# Altium PCB UAC.PcbDoc
Units mm, origin at the board's own origin, x right, y up, seen from the top; angles counter-clockwise.
Board outline 33.7 x 40.5 mm, 4 copper layers (Top Layer, Inner Layer1, Inner Layer2, Bottom Layer), stack 1.369 mm thick; 62 components, 35 nets, 241 pads, 79 vias.
Unrouted connection lines stored in the file: 9.
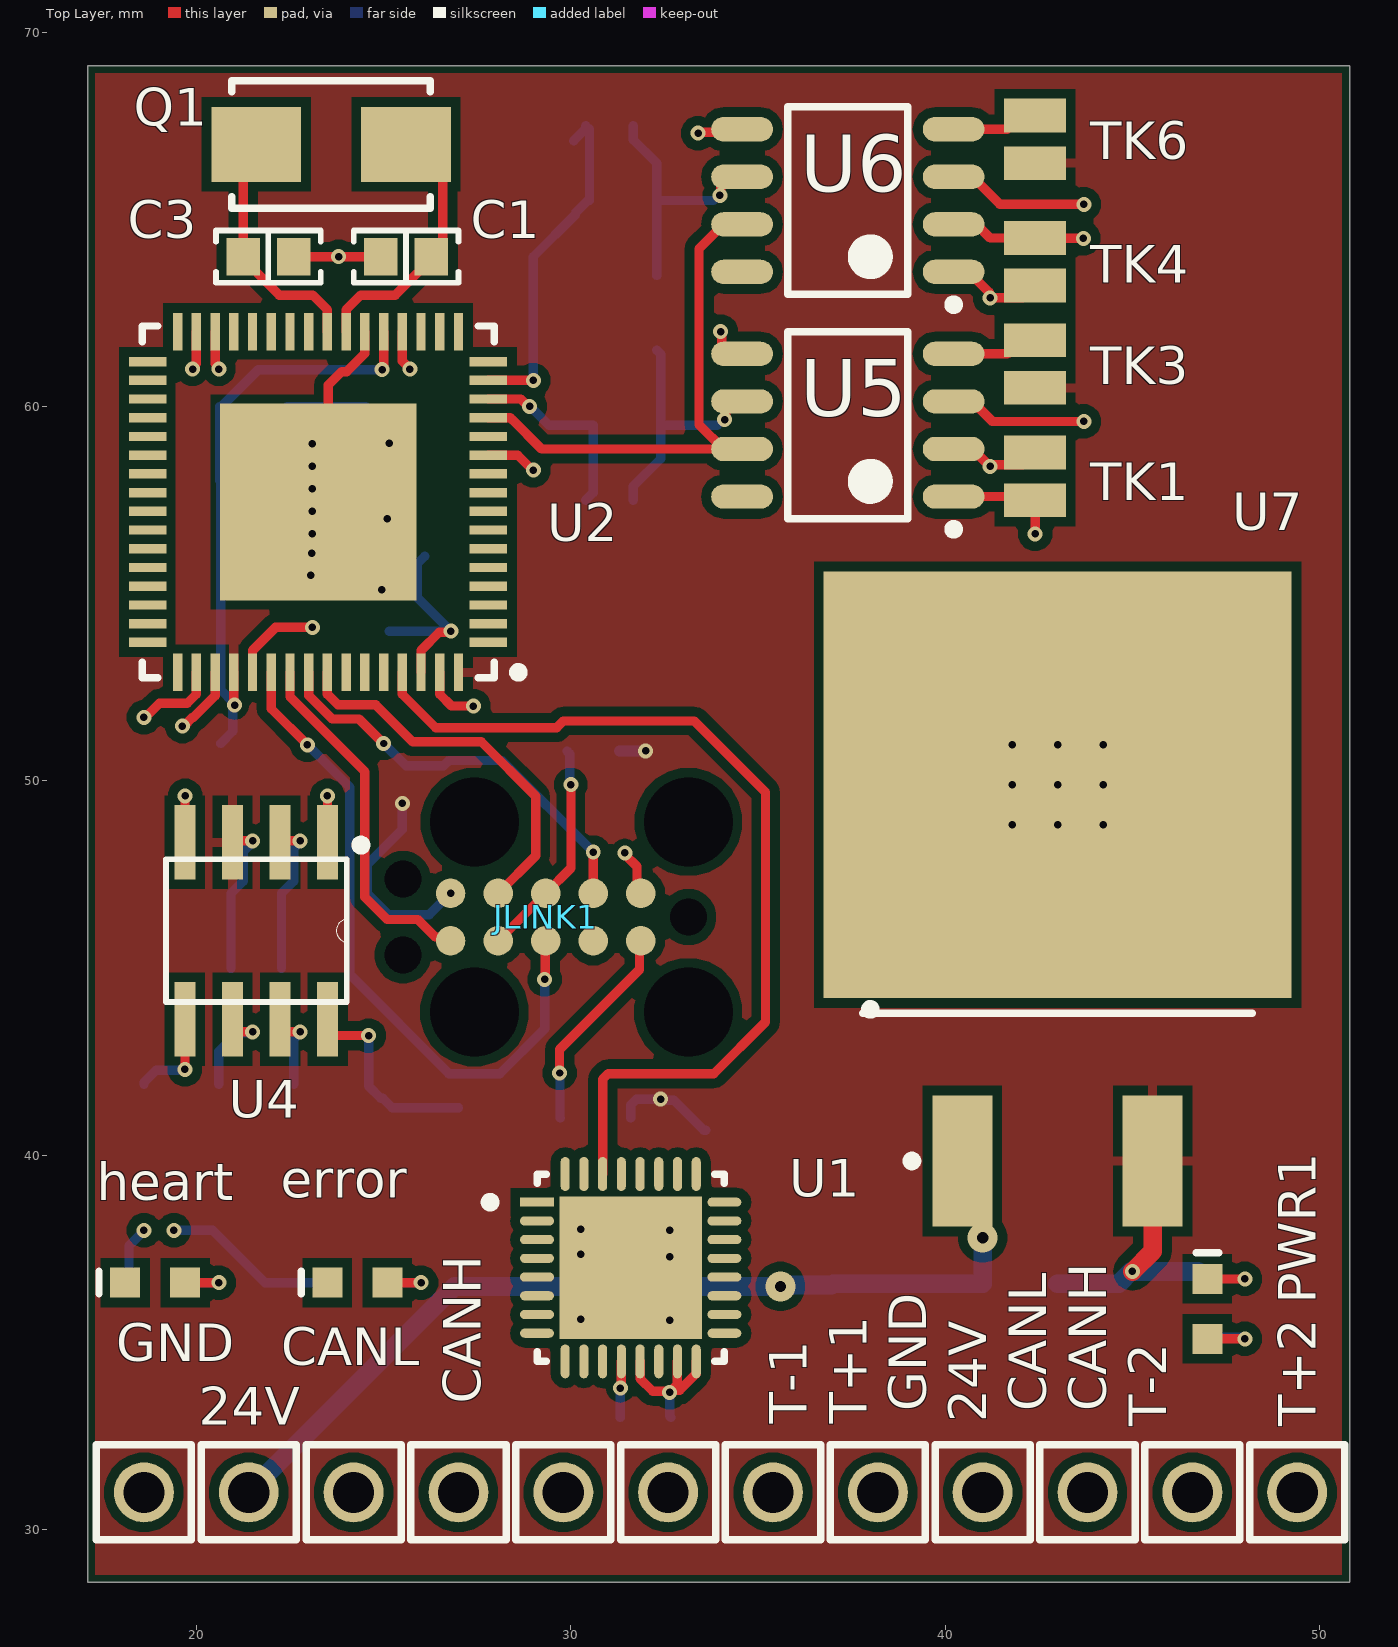
[diagram p0: Top Layer view]
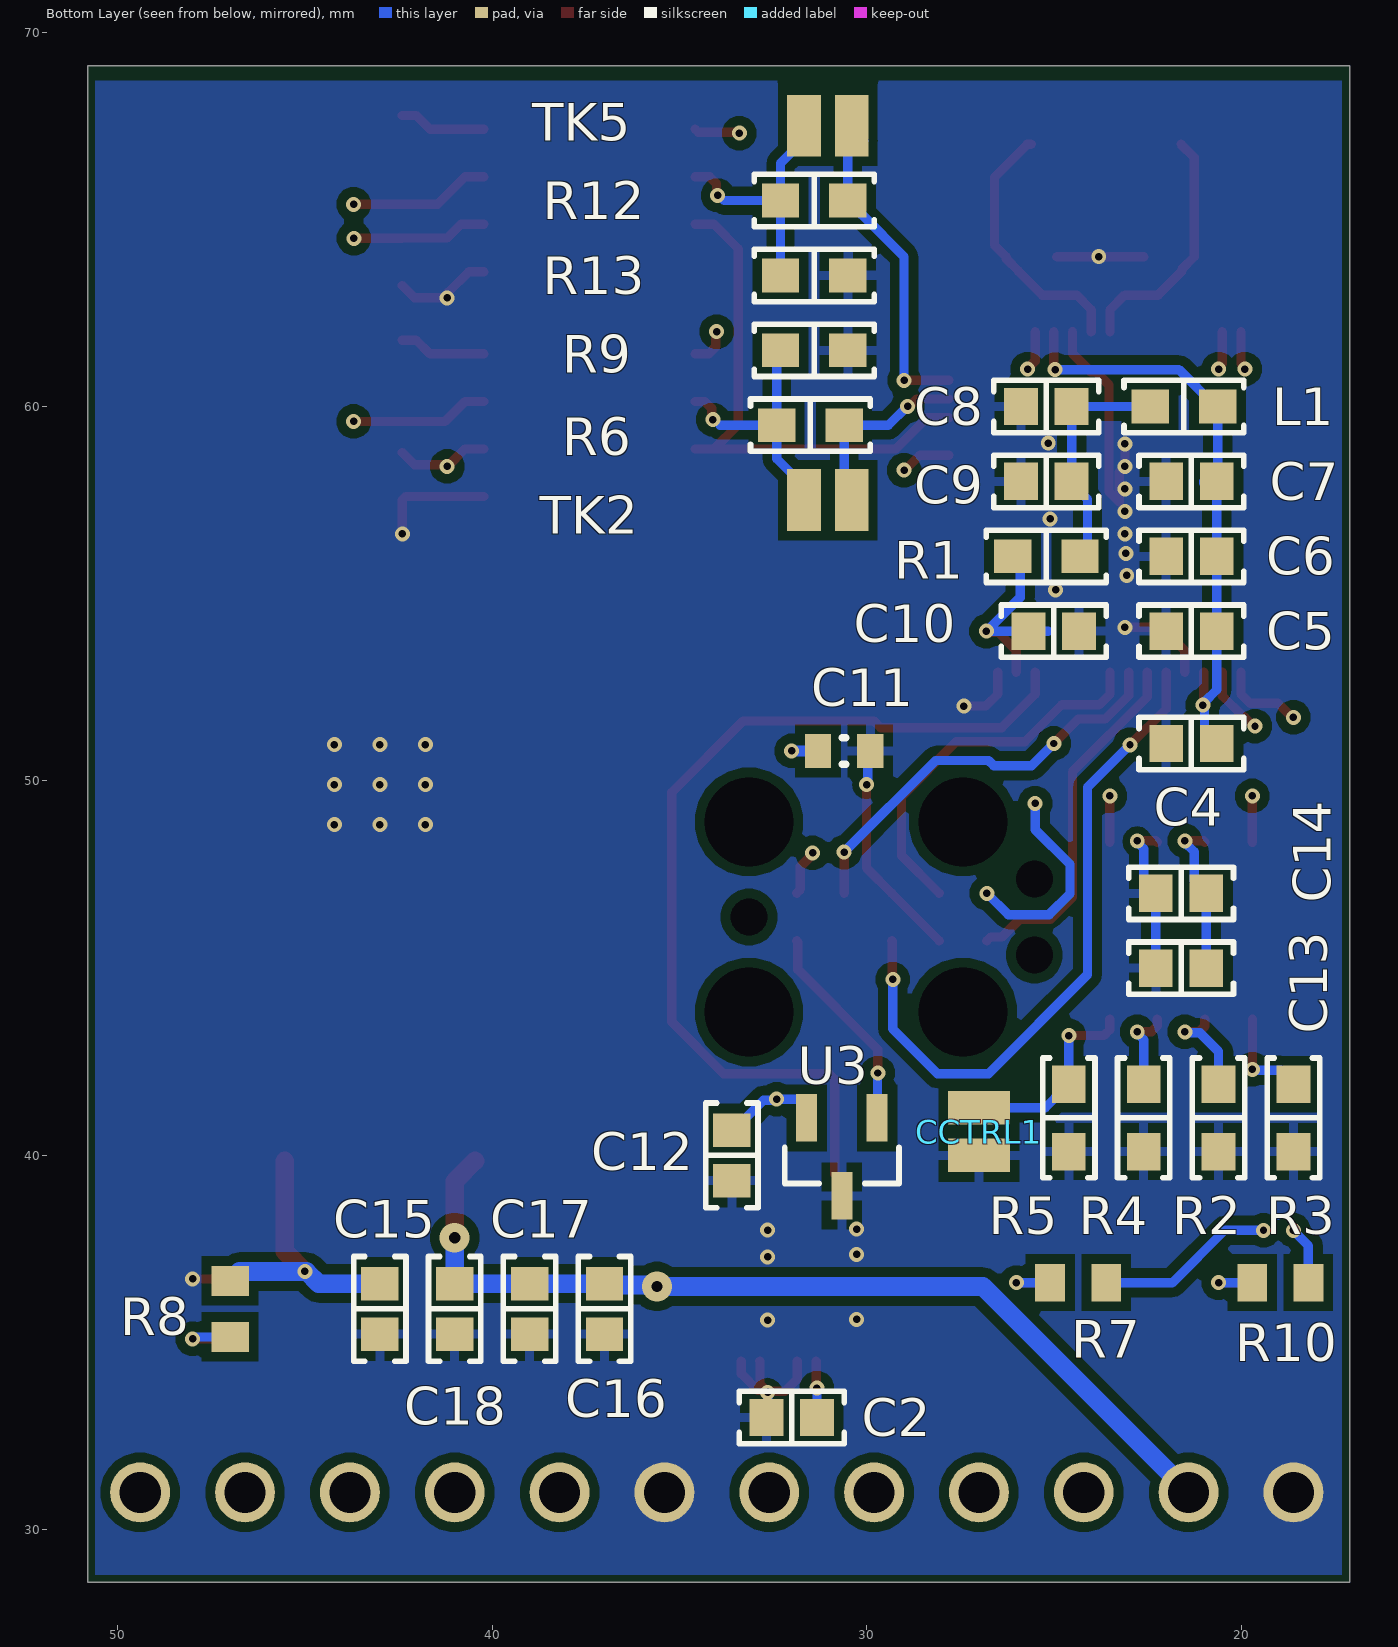
[diagram p1: Bottom Layer view, seen from below]
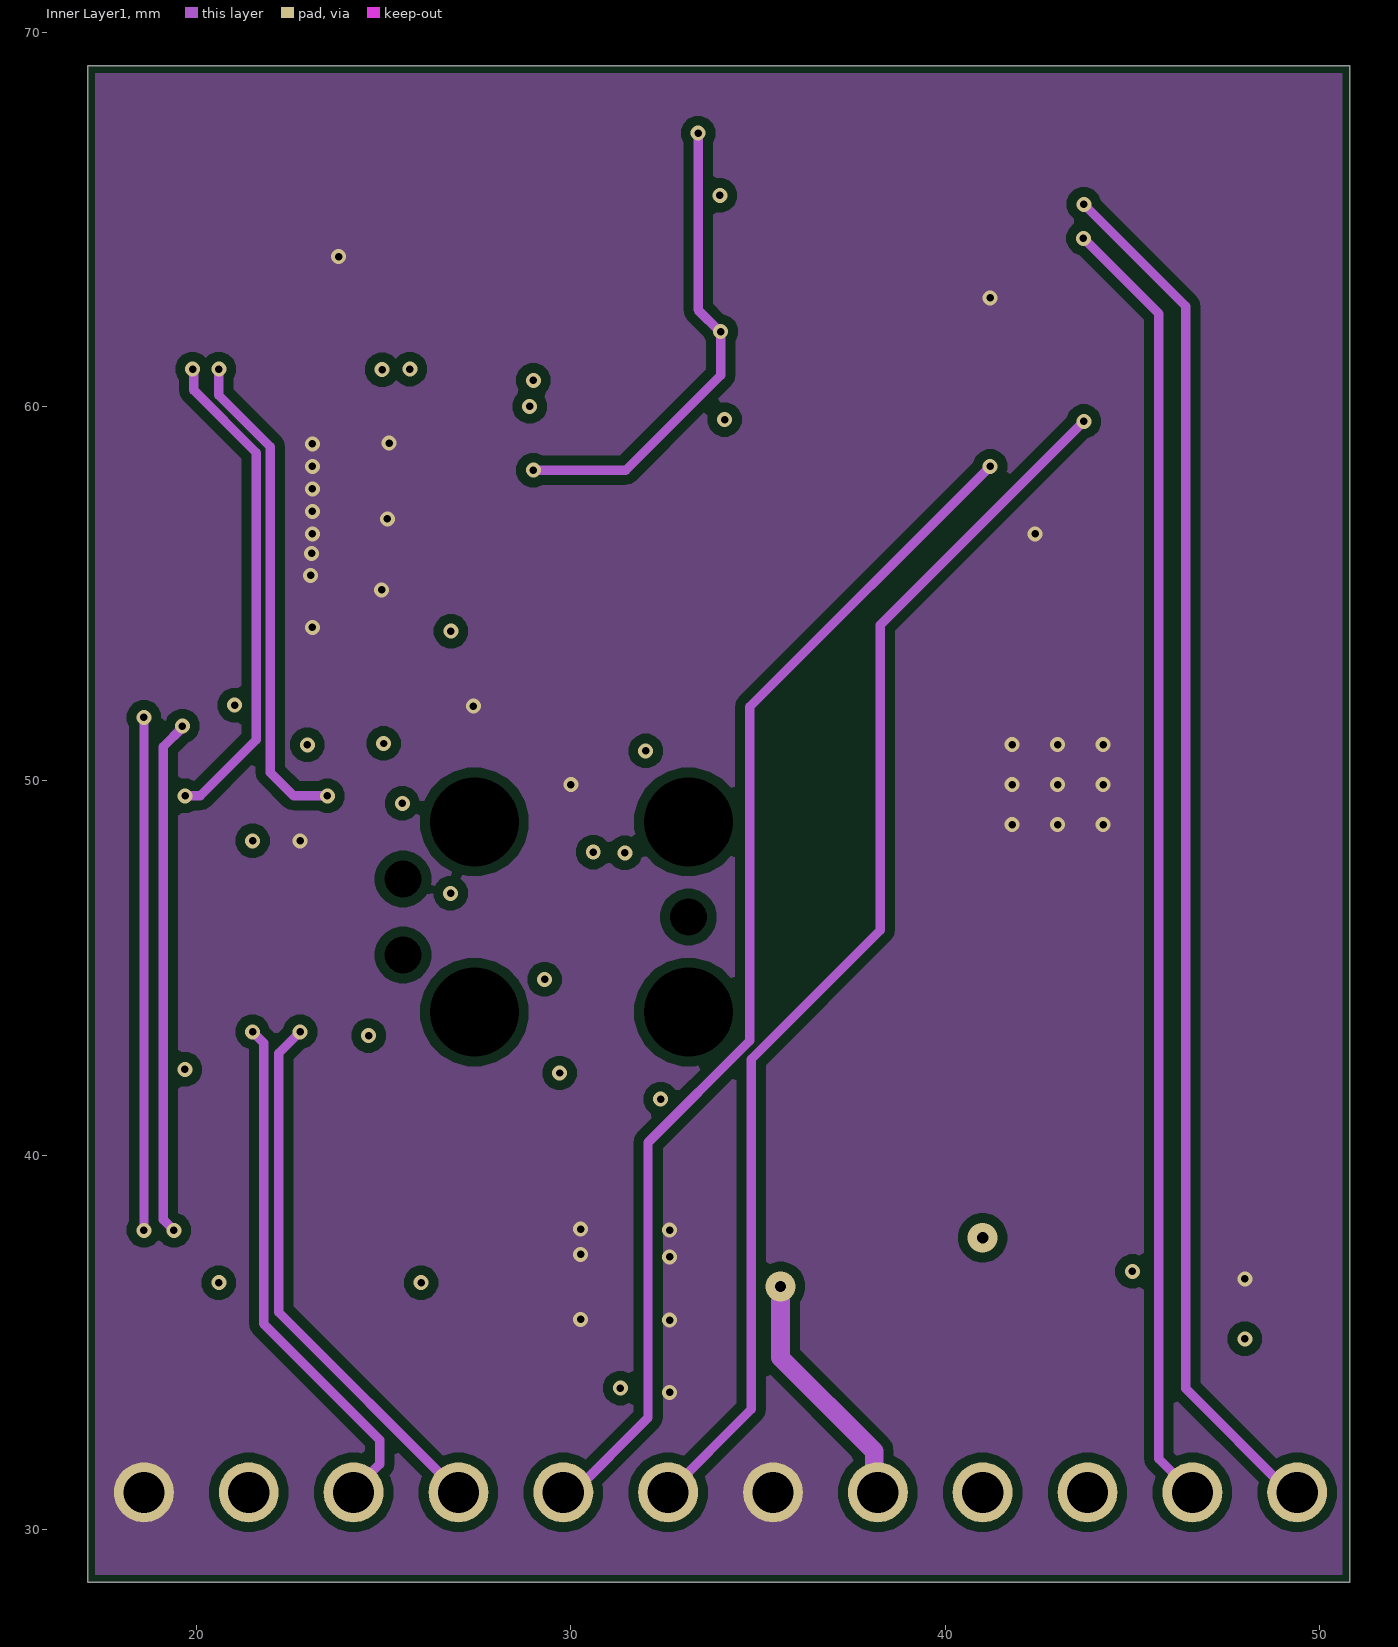
[diagram p2: Inner Layer1]
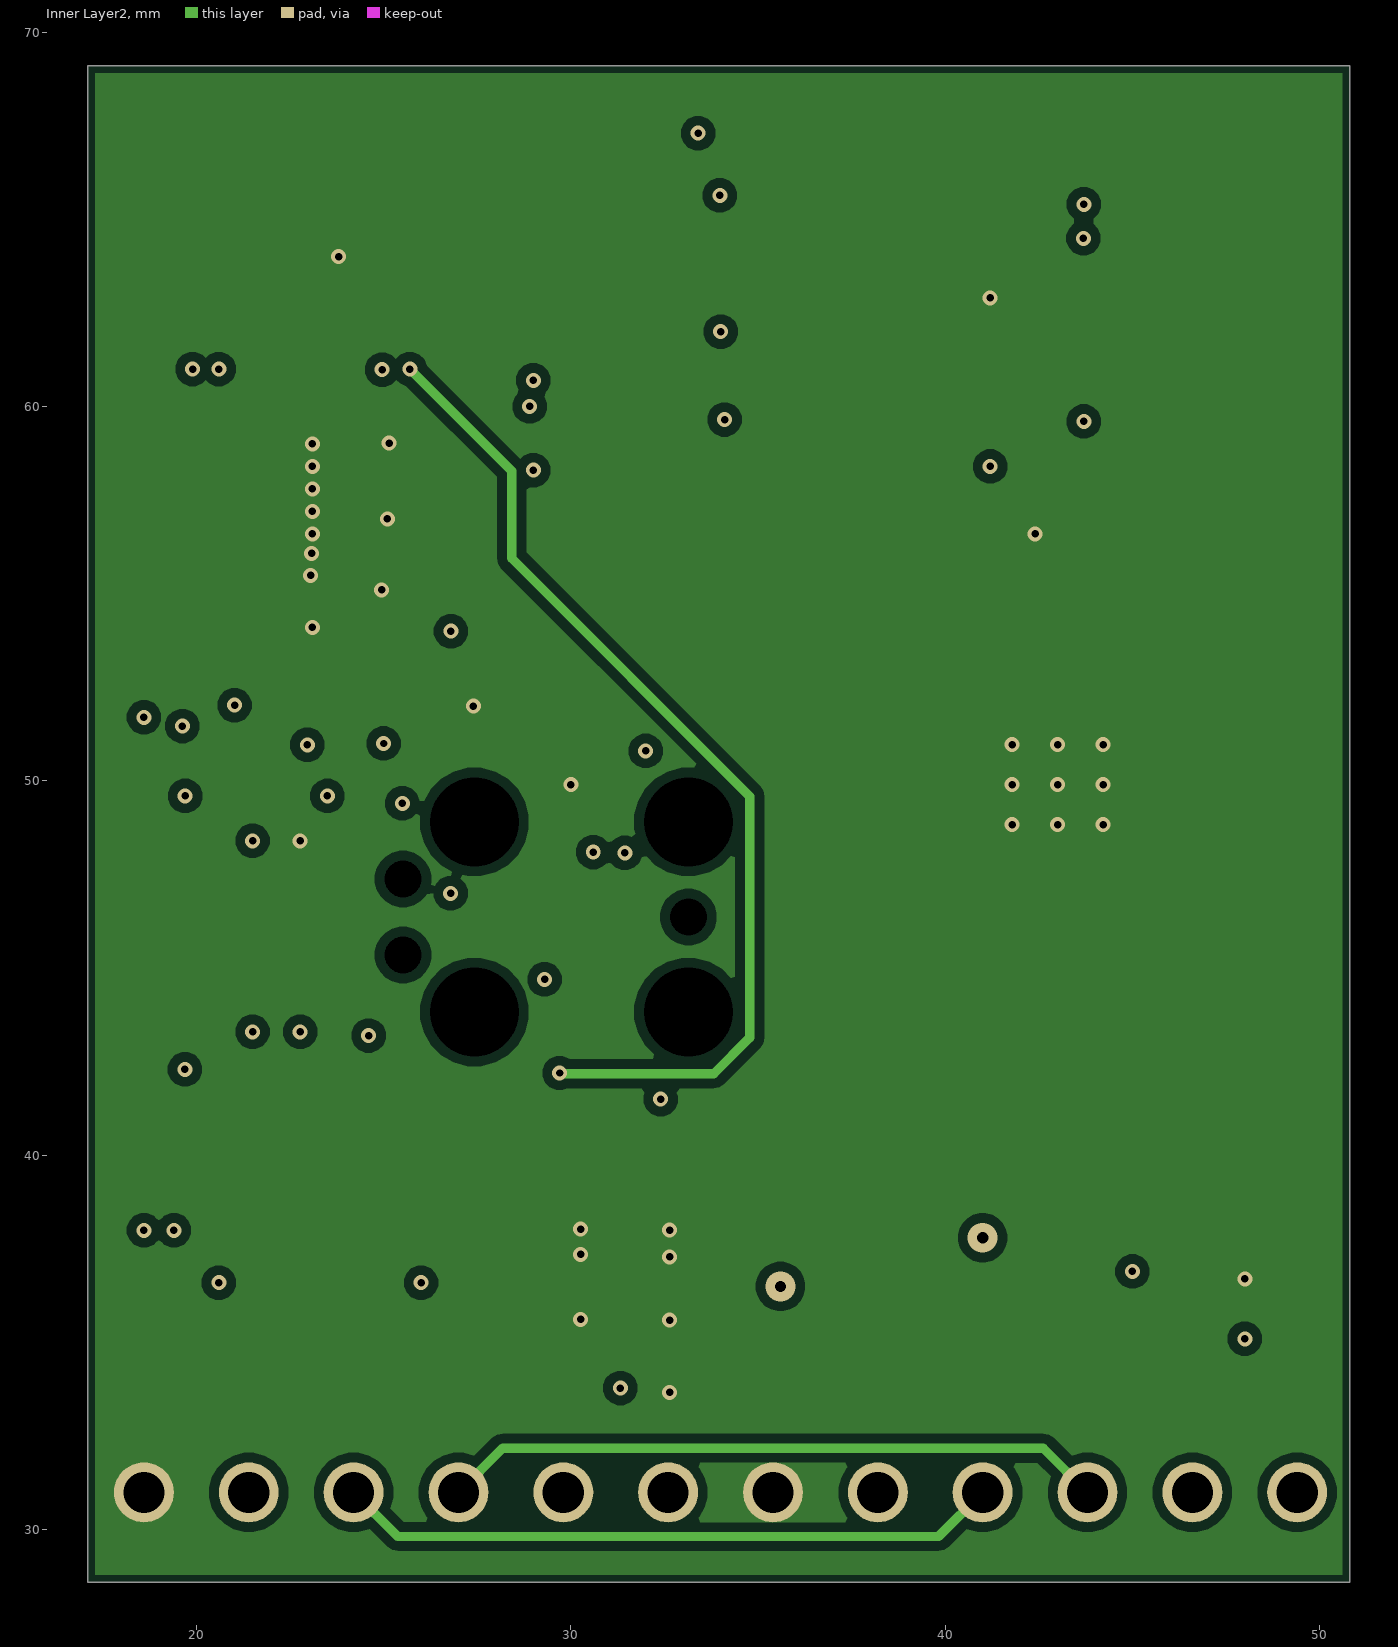
[diagram p3: Inner Layer2]
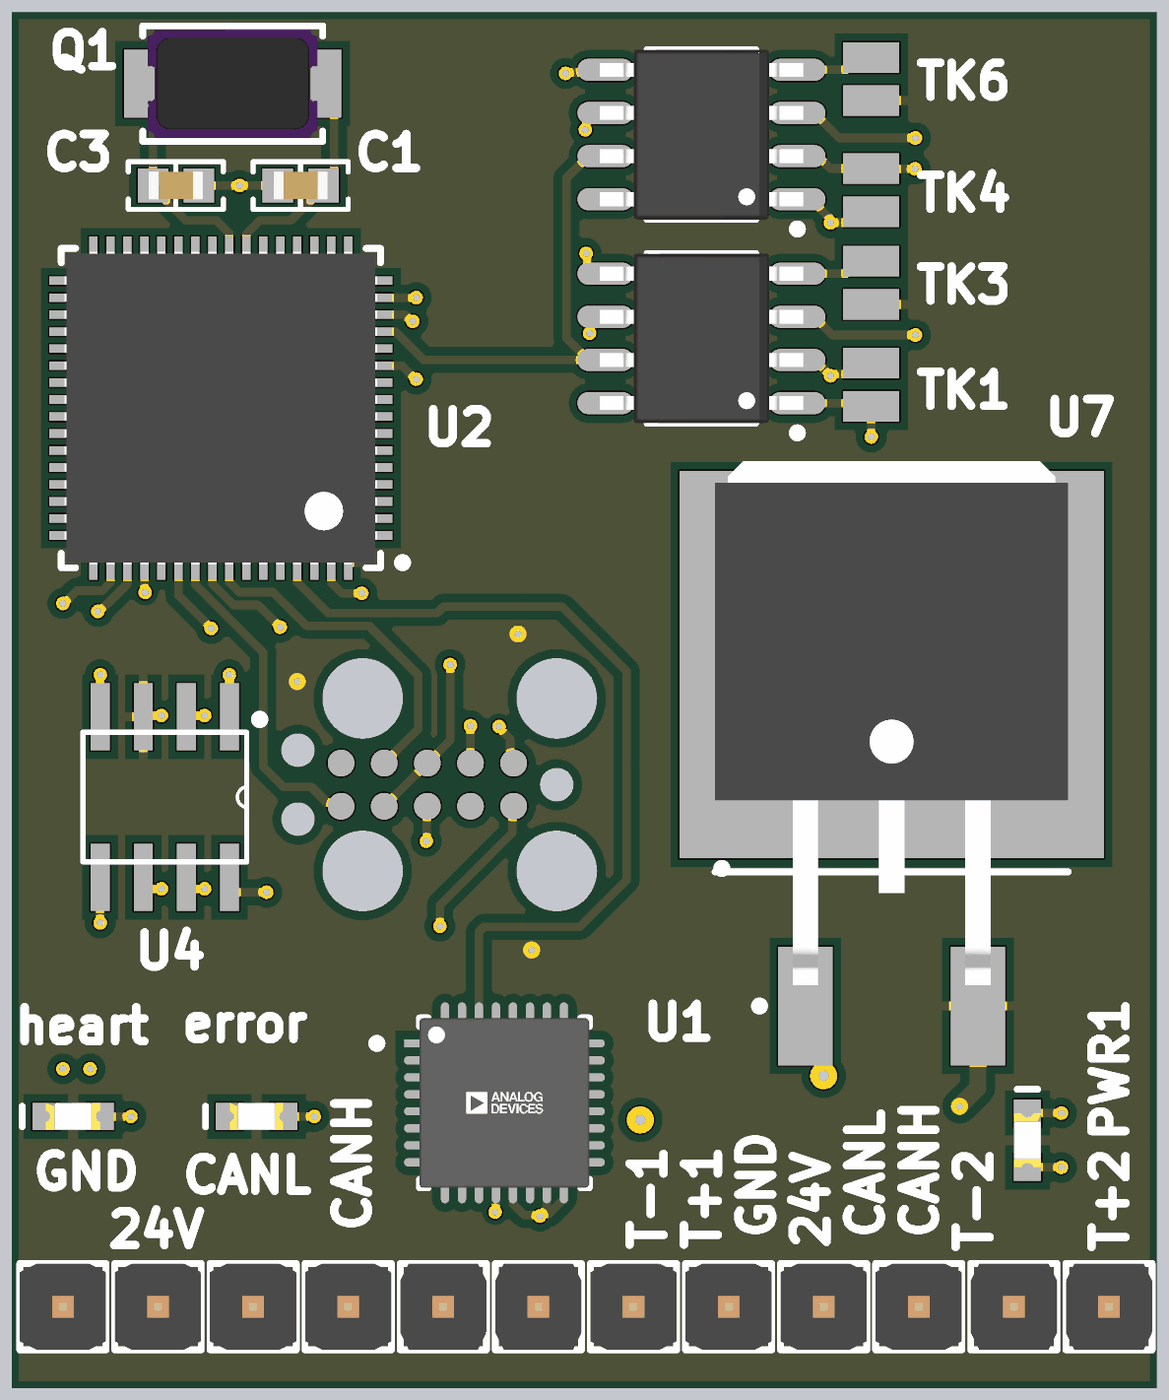
[diagram p4: 3D render of the assembled board from above, using the file's embedded part models]
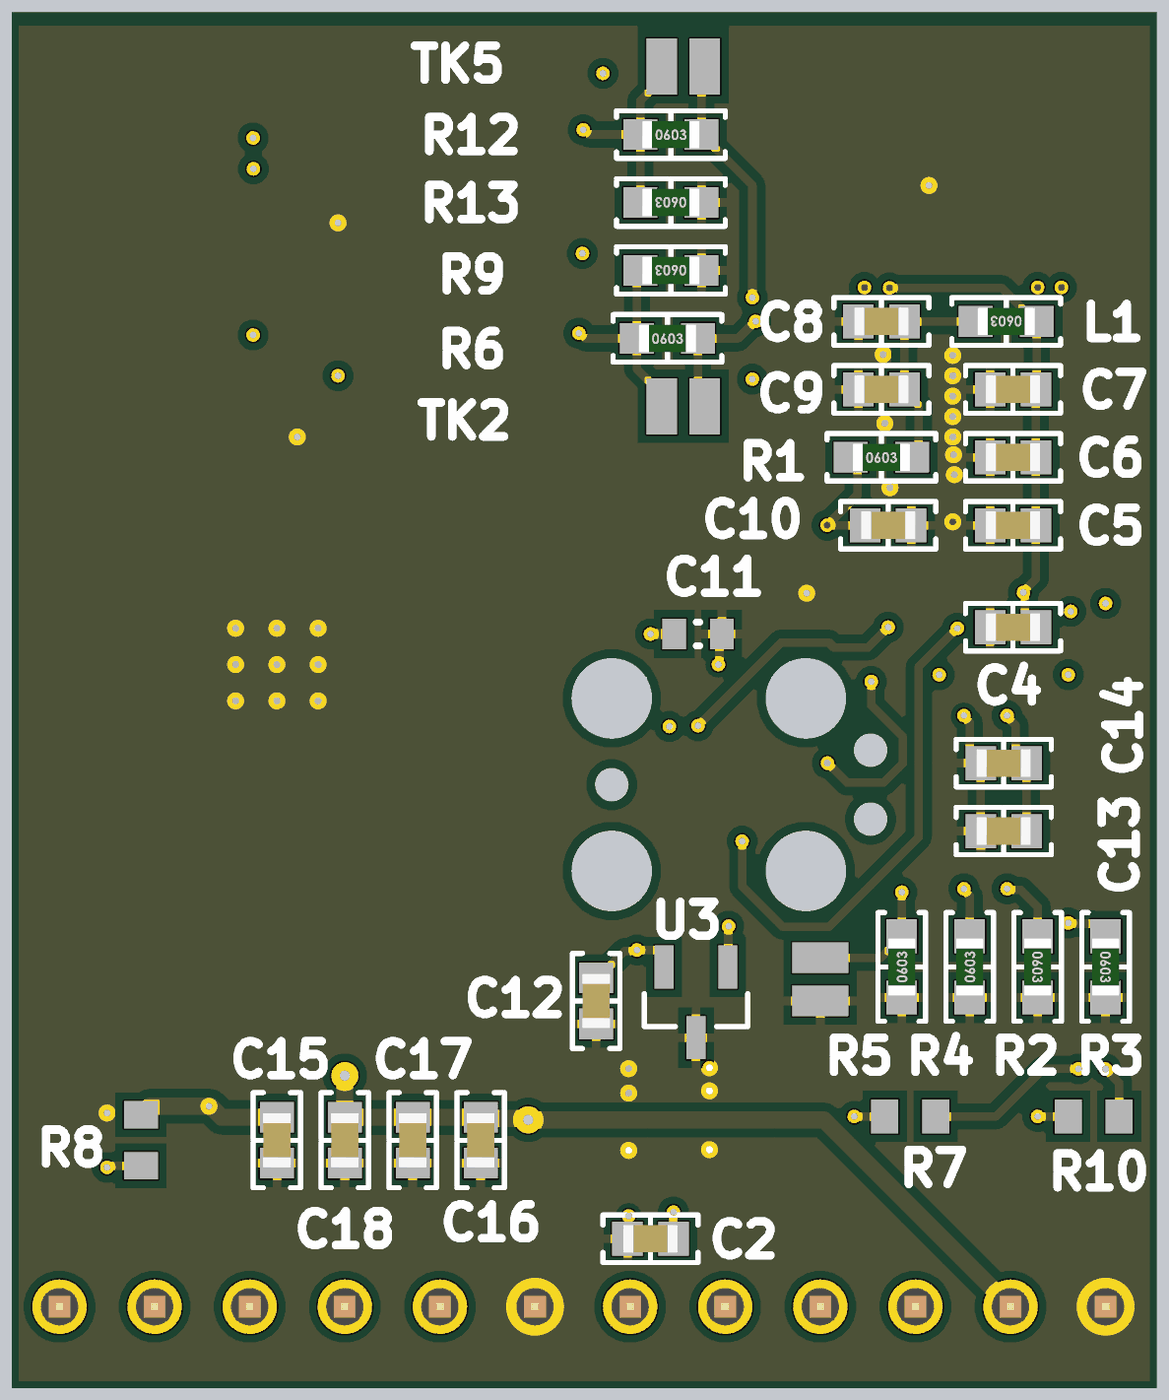
[diagram p5: 3D render of the assembled board from below, using the file's embedded part models]

## Layer stack, top to bottom
Top Solder: solder mask 0.0254, SM-001, Dk 4
Top Layer: signal copper 0.035
Dielectric 1: prepreg 0.1295, PP-017, Dk 4.3
Dielectric 2: prepreg 0.1295, PP-017, Dk 4.3
Inner Layer1: signal copper 0.035
Dielectric 3: core 0.7112, Core-039, Dk 4.8
Inner Layer2: signal copper 0.035
Dielectric 4: prepreg 0.1295, PP-017, Dk 4.3
Dielectric 5: prepreg 0.1295, PP-017, Dk 4.3
Bottom Layer: signal copper 0.035
Bottom Solder: solder mask 0.0254, SM-001, Dk 4

## Board outline
17.1,69.1 50.8,69.1 50.8,28.6 17.1,28.6 17.1,28.9

## Design rules (kind name [scope] priority, off if disabled: settings)
BoardOutlineClearance [All] p1: gap=0.2 ignorepadtopadclearanceinfootprint=FALSE // Trace to V-cut >0.4mm
Clearance Clearance_1 [All] p1: gap=0.254 ignorepadtopadclearanceinfootprint=FALSE except(0: Arc-Hole Track-Hole SMDPad-Hole THPad-Hole Via-Hole Fill-Hole Poly-Hole Region-Hole Text-Hole)
Clearance [All] p2: gap=0.254 ignorepadtopadclearanceinfootprint=TRUE except(0: Arc-Hole Track-Hole SMDPad-Hole THPad-Hole Via-Hole Fill-Hole Poly-Hole Region-Hole Text-Hole; 0.127: Arc-Arc Arc-Track Arc-Fill Arc-Poly Arc-Region Track-Track Track-Fill Track-Poly Track-Region SMDPad-SMDPad; 0.15: Arc-Text Track-Text SMDPad-Text THPad-Text Via-Text Fill-Text Poly-Text Region-Text Text-Text; 0.2: Arc-SMDPad Track-SMDPad SMDPad-Fill SMDPad-Poly SMDPad-Region; 0.33: Arc-THPad Track-THPad THPad-Fill THPad-Poly THPad-Region; 0.5: SMDPad-THPad THPad-THPad THPad-Via)
DiffPairsRouting [All] p1: maxlimit=10 minlimit=0.254 mostfreqgap=0.254 toplayer_minwidth=0.127 toplayer_maxwidth=5 toplayer_prefwidth=0.254 midlayer1_minwidth=0.127 midlayer1_maxwidth=5 midlayer1_prefwidth=0.254 midlayer2_minwidth=0.127 midlayer2_maxwidth=5 midlayer2_prefwidth=0.254 bottomlayer_minwidth=0.127 bottomlayer_maxwidth=5 bottomlayer_prefwidth=0.254 maxuncoupledlength=12.7
HoleSize [All] p1: absolutevalues=TRUE maxlimit=6.3 minlimit=0.2 maxpercent=80.000 minpercent=20.000 // Finished hole size tolerance +0.13/-0.08mm
HoleToHoleClearance [All] p1: gap=0.5 allowstackedmicrovias=TRUE
MinimumAnnularRing [All] p1: minimumring=0.13 // 1oz Copper
PolygonConnect [All] p1: connectstyle=Relief reliefconductorwidth=0.254 reliefentries=4 polygonreliefangle="90 Angle" airgapwidth=0.254
RoutingVias [All] p1: holewidth=0.711 width=1.27 viastyle="Through Hole" minholewidth=0.2 minwidth=0.4 maxholewidth=0.711 maxwidth=1.27
SolderMaskExpansion [All] p1: expansion=0.05 istentingtop=FALSE
Width [All] p1: maxlimit=20 minlimit=0.09 preferedwidth=0.25 minimp=50.000000 maximp=50.000000 favimp=50.000000
27 further rules are at their usual default settings.

## Components (designator, comment, footprint, x,y, rotation, side; value= is the part's Value field where it differs from the comment)
24V "61300111121" 61300111121 21.4,31 r90 top (schematic designator 2)
24V "61300111121" 61300111121 38.2,31 r90 top (schematic designator 1)
C1 "SMD Capacitor" "CAP 0603/1608" 25.6,64 r0 top value=18pF
C2 "SMD Capacitor" "CAP 0603/1608" 32,33 r0 bottom value=1uF
C3 "SMD Capacitor" "CAP 0603/1608" 21.925,64 r180 top value=18pF
C4 "SMD Capacitor" "CAP 0603/1608" 21.325,51 r180 bottom value=1uF
C5 "SMD Capacitor" "CAP 0603/1608" 21.325,54 r180 bottom value=100nF
C6 "SMD Capacitor" "CAP 0603/1608" 21.325,56 r180 bottom value=1uF
C7 "SMD Capacitor" "CAP 0603/1608" 21.325,58 r180 bottom value=100nF
C8 "SMD Capacitor" "CAP 0603/1608" 25.2,60 r0 bottom value=1uF
C9 "SMD Capacitor" "CAP 0603/1608" 25.2,58 r0 bottom value=100nF
C10 "SMD Capacitor" "CAP 0603/1608" 25,54 r180 bottom value=1uF
C11 "100nF 10V" CAPC0603(1608)100_L 30.6,50.8 r180 bottom value=100nF
C12 "SMD Capacitor" "CAP 0603/1608" 33.6,40 r270 bottom value=1uF
C13 "SMD Capacitor" "CAP 0603/1608" 21.6,45 r180 bottom value=100nF
C14 "SMD Capacitor" "CAP 0603/1608" 21.6,47 r180 bottom value=100nF
C15 "SMD Capacitor" "CAP 0603/1608" 43,35.9 r270 bottom value=100nF
C16 "SMD Capacitor" "CAP 0603/1608" 37,35.9 r270 bottom value=100nF
C17 "SMD Capacitor" "CAP 0603/1608" 39,35.9 r270 bottom value=220nF
C18 "SMD Capacitor" "CAP 0603/1608" 41,35.9 r270 bottom value=10nF
CANH "61300111121" 61300111121 27,31 r90 top (schematic designator CANH2)
CANH "61300111121" 61300111121 43.8,31 r90 top (schematic designator CANH1)
CANL "61300111121" 61300111121 24.2,31 r90 top (schematic designator CANL2)
CANL "61300111121" 61300111121 41,31 r90 top (schematic designator CANL1)
CCTRL1 "SMD Jumper open" SMD-JUMPER-OPEN 27,40.635 r90 bottom
error "0603 Red" 0603_A 24.3,36.6 r0 top (schematic designator Fehler1)
GND "61300111121" 61300111121 18.6,31 r90 top (schematic designator GND2)
GND "61300111121" 61300111121 35.4,31 r90 top (schematic designator GND1)
heart "0603 Blue" 0603_A 18.9,36.6 r0 top (schematic designator Heart1)
JLINK1 "JTAG" SEGGER_10_PIN 33.14,46.365 r180 top
L1 "SMD Resistor" "STACKPOLE CSR0603" 21.525,60 r0 bottom value=100n
PWR1 "0603 Green" 0603_A 47,35.9 r270 top
Q1 "16M" "NDK NX5032GA" 23.6,67 r0 top
R1 "SMD Resistor" "STACKPOLE CSR0603" 25.2,56 r180 bottom value=100
R2 "SMD Resistor" "STACKPOLE CSR0603" 20.6,41 r270 bottom value=60
R3 "SMD Resistor, optional" "STACKPOLE CSR0603" 18.6,41 r270 bottom value=300
R4 "SMD Resistor" "STACKPOLE CSR0603" 22.6,41 r90 bottom value=60
R5 "SMD Resistor" "STACKPOLE CSR0603" 24.6,41 r90 bottom value="Slope CTRL def. free"
R6 "SMD Resistor" "STACKPOLE CSR0603" 31.5,59.5 r180 bottom value="10K 0603"
R7 "0603 100" RESC1608X55X25ML10T15 24.35,36.6 r0 bottom
R8 "0603 100" RESC1608X55X25ML10T15 47,35.9 r270 bottom
R9 "SMD Resistor" "STACKPOLE CSR0603" 31.4,61.5 r0 bottom value="18K 0603"
R10 "0603 100" RESC1608X55X25ML10T15 18.95,36.6 r0 bottom
R12 "SMD Resistor" "STACKPOLE CSR0603" 31.4,65.5 r180 bottom value="10K 0603"
R13 "SMD Resistor" "STACKPOLE CSR0603" 31.4,63.5 r0 bottom value="18K 0603"
T+1 "61300111121" 61300111121 32.6,31 r0 top
T+2 "61300111121" 61300111121 49.4,31 r0 top
T-1 "61300111121" 61300111121 29.8,31 r0 top
T-2 "61300111121" 61300111121 46.6,31 r0 top
TK1 "SMD Jumper open" SMD-JUMPER-OPEN 42.4,58.135 r90 top
TK2 "SMD Jumper open" SMD-JUMPER-OPEN 31.035,57.5 r180 bottom
TK3 "SMD Jumper open" SMD-JUMPER-OPEN 42.4,61.135 r90 top
TK4 "SMD Jumper open" SMD-JUMPER-OPEN 42.4,63.865 r90 top
TK5 "SMD Jumper open" SMD-JUMPER-OPEN 31.035,67.5 r180 bottom
TK6 "SMD Jumper open" SMD-JUMPER-OPEN 42.4,67.135 r90 top
U1 "ADXL1002BCPZ" Analog_Devices_CP-32-26_IPC_A 31.6,37 r0 top
U2 "AT90CAN128" AT90CAN128-16MU 23.25,57.45 r180 top
U3 "MCP130T-450I/TT" *SOT95P237X112-3N 30.66,39.959 r0 bottom
U4 "MCP2551/2561" *SOIC127P600X175-8N 21.6,46 r270 top
U5 "MAX6675ISA+" SOIC8 37.4,59.5 r180 top value=Value
U6 "MAX6675ISA+" SOIC8 37.4,65.5 r180 top value=Value
U7 "L7805ABD2T-TR" DPAK254P1542X460-3M 43,47.15 r90 top

## Footprints (in the part's own frame and the unit in brackets; to place one, negate y for a bottom-side part, rotate by r counter-clockwise, add the part's x,y. Pads: shape width x height; smd on the part's side, far side on the other; paste and mask are expansions set on the pad)
0603_A [mm] "Chip LED, 2-Leads, Body 1.6x0.8mm, IPC Medium Density"
  rect 0.8x0.8 smd: 1(-0.8,0) 2(0.8,0)
  silkscreen extent -1.5,-0.3 -1.5,0.3, body extent -0.8,-0.4 0.8,0.4, height 0.7
61300111121 [mm] "1pins, 1 row, straight, gold plating"
  round 1.6 hole 1.1: 1(0,0)
  silkscreen extent -1.27,-1.27 1.27,1.27, body extent -1.27,-1.27 1.27,1.27, height 8.57
*SOIC127P600X175-8N [mil]
  rect 78x22 smd: 1(-93,75) 2(-93,25) 3(-93,-25) 4(-93,-75) 5(93,-75) 6(93,-25) 7(93,25) 8(93,75)
  silkscreen extent -95,-95 75,115, body extent -75,-95 75,95, height 80
*SOT95P237X112-3N [mil]
  rect 22x50 smd: 1(-37,-41) 2(37,-41) 3(0,41)
  silkscreen extent -60,-10 60,28, body extent -60,-25 60,25, height 50
Analog_Devices_CP-32-26_IPC_A [mm]
  rect 0.906x0.242 smd paste+0 mask+0: 1(-2.503,1.75)
  rrect100% 0.906x0.242 smd paste+0 mask+0: 2(-2.503,1.25) 3(-2.503,0.75) 4(-2.503,0.25) 5(-2.503,-0.25) 6(-2.503,-0.75) 7(-2.503,-1.25) 8(-2.503,-1.75) 17(2.503,-1.75) 18(2.503,-1.25) 19(2.503,-0.75) 20(2.503,-0.25) 21(2.503,0.25) 22(2.503,0.75) 23(2.503,1.25) 24(2.503,1.75)
  rrect100% 0.242x0.906 smd paste+0 mask+0: 9(-1.75,-2.503) 10(-1.25,-2.503) 11(-0.75,-2.503) 12(-0.25,-2.503) 13(0.25,-2.503) 14(0.75,-2.503) 15(1.25,-2.503) 16(1.75,-2.503) 25(1.75,2.503) 26(1.25,2.503) 27(0.75,2.503) 28(0.25,2.503) 29(-0.25,2.503) 30(-0.75,2.503) 31(-1.25,2.503) 32(-1.75,2.503)
  rect 3.8x3.8 smd paste-1000 mask+0: 33(0,0)
  silkscreen extent -3.88,-2.5 2.5,2.5, body extent -2.5,-2.5 2.5,2.5, height 1.85
AT90CAN128-16MU [mm] "QFN, 64-Leads, Body 9,00x9,00mm, Pitch 0,50mm, Thermal Pad 5,25x5,25mm, IPC Medium Density"
  rect 1x0.25 smd mask+0.05: 1(-4.55,3.75) 2(-4.55,3.25) 3(-4.55,2.75) 4(-4.55,2.25) 5(-4.55,1.75) 6(-4.55,1.25) 7(-4.55,0.75) 8(-4.55,0.25) 9(-4.55,-0.25) 10(-4.55,-0.75) 11(-4.55,-1.25) 12(-4.55,-1.75) 13(-4.55,-2.25) 14(-4.55,-2.75) 15(-4.55,-3.25) 16(-4.55,-3.75) 33(4.55,-3.75) 34(4.55,-3.25) 35(4.55,-2.75) 36(4.55,-2.25) 37(4.55,-1.75) 38(4.55,-1.25) 39(4.55,-0.75) 40(4.55,-0.25) 41(4.55,0.25) 42(4.55,0.75) 43(4.55,1.25) 44(4.55,1.75) 45(4.55,2.25) 46(4.55,2.75) 47(4.55,3.25) 48(4.55,3.75)
  rect 0.25x1 smd mask+0.05: 17(-3.75,-4.55) 18(-3.25,-4.55) 19(-2.75,-4.55) 20(-2.25,-4.55) 21(-1.75,-4.55) 22(-1.25,-4.55) 23(-0.75,-4.55) 24(-0.25,-4.55) 25(0.25,-4.55) 26(0.75,-4.55) 27(1.25,-4.55) 28(1.75,-4.55) 29(2.25,-4.55) 30(2.75,-4.55) 31(3.25,-4.55) 32(3.75,-4.55) 49(3.75,4.55) 50(3.25,4.55) 51(2.75,4.55) 52(2.25,4.55) 53(1.75,4.55) 54(1.25,4.55) 55(0.75,4.55) 56(0.25,4.55) 57(-0.25,4.55) 58(-0.75,4.55) 59(-1.25,4.55) 60(-1.75,4.55) 61(-2.25,4.55) 62(-2.75,4.55) 63(-3.25,4.55) 64(-3.75,4.55)
  rect 5.25x5.25 smd: 63(0,0)
  silkscreen extent -5.48,-4.7 4.7,4.7, body extent -4.6,-4.6 4.6,4.6, height 1
"CAP 0603/1608" [mm] "Chip Capacitor, 2-Leads, Body 1.60x0.80mm, IPC Medium Density"
  rect 0.9x1 smd: 1(-0.675,0) 2(0.675,0)
  silkscreen extent -1.4,-0.7 1.4,0.7, body extent -0.8,-0.41 0.8,0.41, height 0.82
CAPC0603(1608)100_L [mm] "Chip Capacitor, Body 1.6x0.8mm, Height 1.0mm, IPC High Density"
  rect 0.7x0.9 smd: 1(-0.7,0) 2(0.7,0)
  silkscreen extent -0.05,-0.35 0.05,0.35, body extent -0.87,-0.47 0.88,0.48, height 1
DPAK254P1542X460-3M [mm] "D2-PAK, 3-Pads, Body 7,78x8,56mm (max), IPC Low Density"
  rect 3.5x1.6 smd: 1(-7.3,2.54) 3(-7.3,-2.54)
  rect 11.4x12.5 smd: 4(2.75,0)
  silkscreen extent -7.42,-5.2 -3.35,5.2, body extent -6.69,-5.2 8.73,5.2, height 4.63
"NDK NX5032GA" [mm] "Crystal, 2-Leads, Body 5.00x3.20mm, IPC Medium Density"
  rect 2.4x2 smd: 1(-2,0) 2(2,0)
  silkscreen extent -2.65,-1.7 2.65,1.7, body extent -2.5,-1.6 2.5,1.6, height 1.2
RESC1608X55X25ML10T15 [mm] "Chip Resistor, 2-Leads, Body 1.60x0.80mm, IPC Low Density"
  rect 0.8x1 smd: 1(-0.75,0) 2(0.75,0)
  body extent -0.85,-0.45 0.85,0.45, height 0.55
SEGGER_10_PIN [mm]
  round 0.787 smd: 1(1.27,-0.635) 2(2.54,-0.635) 3(3.81,-0.635) 4(5.08,-0.635) 5(6.35,-0.635) 6(6.35,0.635) 7(5.08,0.635) 8(3.81,0.635) 9(2.54,0.635) 10(1.27,0.635)
  round 0 hole 2.375 unplated: ""(0,2.54) ""(0,-2.54) ""(5.715,-2.54) ""(5.715,2.54)
  round 0 hole 0.991 unplated: ""(0,0) ""(7.62,-1.015) ""(7.62,1.015)
SMD-JUMPER-OPEN [mm] "Jumper, SMD"
  rect 0.9x1.65 smd: 1(-0.635,0) 2(0.635,0)
SOIC8 [mm] "SOIC, 8-Leads, Body 4,90x3,90mm, Pitch 1,27mm, IPC Low Density"
  oval 1.65x0.65 smd: 1(-2.825,1.905) 2(-2.825,0.635) 3(-2.825,-0.635) 4(-2.825,-1.905) 5(2.825,-1.905) 6(2.825,-0.635) 7(2.825,0.635) 8(2.825,1.905)
  silkscreen extent -2.95,-2.5 1.6,2.9, body extent -3,-2.5 3,2.5, height 1.75
"STACKPOLE CSR0603" [mm] "Chip Resistor, 2-Leads, Body 1.60x0.80mm, IPC Medium Density"
  rect 1x0.9 smd: 1(-0.9,0) 2(0.9,0)
  silkscreen extent -1.6,-0.7 1.6,0.7, body extent -0.85,-0.4 0.85,0.4, height 0.45

## Part data
24V 24V CANH CANH CANL CANL GND GND T+1 T+2 T-1 T-2: "WR-PHD 2.54 mm THT Pin Header, 1p", Rated Current="3 A", Withstanding Voltage="500 VAC", Working Voltage="250 VAC", ComponentLink1Description=Manufacturer, ComponentLink1URL=http://www.we-online.de, ComponentLink2Description=Datasheet, ComponentLink2URL=http://katalog.we-online.de/em/datasheet/6130xx11121.pdf, Part Number=61300111121, Pin Number=1, Pitch="2.54 mm", Published Date="Aug 2017", Publisher="Wurth Elektronik"
C1 C2 C3 C4 C5 C6 C7 C8 C9 C10 C12 C13 C14 C15 C16 C17 C18: "Capacitor with multiple Footprints"
C11: library part CMP-1035-02579-1, "CAP 100nF 10V ±5% 0603 (1608 Metric) Thickness 1mm SMD", Case-EIA=0603, Case-Metric=1608, Rated Voltage="10 V", Tolerance=Â±5%, Max Thickness="1 mm", Technology=SMT
error heart PWR1: library part CMP-1426-00002-1, "SMD mono-color Chip LED, WL-SMCW, Green", Color=Green, Manufacturer="Wuerth Elektronik", PartNumber=150060GS75000, ComponentLink1Description="Manufacturer URL", ComponentLink1URL=http://www.we-online.com, ComponentLink2Description=Datasheet, ComponentLink2URL=http://katalog.we-online.com/led/datasheet/150060GS75000.pdf, PackageReference=0603_A
JLINK1: library part "Segger 10-Pin"
L1: "Spule"
Q1: library part "16 MHz Quartz", "16 MHz Quartz"
R1 R2 R4 R5 R6 R9 R12 R13: "Resistor with multiple footprints"
R3: library part "SMD Resistor", "Resistor with multiple footprints"
R7 R8 R10: library part CMP-2100-03663-1, "Chip Resistor, 100 Ohm, +/- 1%, 0.1 W, -55 to 155 degC, 0603 (1608 Metric), RoHS, Tape and Reel", Case Code (Imperial)=0603, Case Code (Metric)=1608, Manufacturer=Yageo, Max Operating Temperature=155degC, Min Operating Temperature=-55degC, Package Description="2-Pin Surface Mount Device, Body 1.6 x 0.8 mm", Power Rating=100mW, Resistance=100Ohm, Temperature Coefficient=100ppm/degreesC, Tolerance=1%, Voltage Rating=50V, Case/Package=0603, Composition=ThickFilm, Datasheet URL=http://www.yageo.com/NewPortal/yageodocoutput?fileName=/pdf/R-Chip/PYu-RC_Group_51_RoHS_L_5.pdf, Datasheet Version="Rev. 5, 10/2016", Depth=0.8mm, Height=0.45mm, Lead Free=LeadFree, Length=1.6mm, Manufacturer URL=http://www.yageo.com/, Military Standard=Not, Number of Pins=2, Package Reference=0603, Packaging=TapeandReel, REACH SVHC=Unknown, RoHSCompliant=true, Termination=SMD/SMT, Voltage Rating (DC)=50V, Width=0.8mm
U2: "Ic Mcu 8bit 128kb Flash 64tqfp", Package="TQFP-64 Microchip", Availability=Unavailable, MF=Microchip, MP=AT90CAN128-16AI, Price=None, SnapEDA_Link=https://www.snapeda.com/parts/AT90CAN128-16AI/Microchip/view-part/?ref=snap
U3: "System Supervisors - Power Supply Monitors with Reset Generators Open Drain Low", Package="SOT-23-3 Microchip", Availability=Unavailable, MF=Microchip, MP=MCP120T-450I/TT, Price=None, SnapEDA_Link=https://www.snapeda.com/parts/MCP120T-450I/TT/Microchip/view-part/?ref=snap
U4: library part MCP2551-I/SN, "MCP2551 Series 5.5 V 1 Mb/s Surface Mount High-Speed CAN Transceiver - SOIC-8", Package="SOIC-8 Microchip", Availability=Unavailable, MF=Microchip, MP=MCP2551-I/SN, Price=None, SnapEDA_Link=https://www.snapeda.com/parts/MCP2551-I/SN/Microchip/view-part/?ref=snap
U5 U6: library part MAX31855KASA+, "Sensor-Schnittstelle Cold-Junction-Compensated K-Thermocouple-to-Digital Converter (0 C to +1024 C)", Built_By=EMA_UL_Team, ComponentLink1Description="Mouser Link", ComponentLink1URL=https://www.mouser.de/ProductDetail/Maxim-Integrated/MAX6675ISA%2b?qs=sGAEpiMZZMvC4tFtz7F%252BjlDa83CXkCzyzlU%2FLj4OjiI%3D, ComponentLink2Description=Datasheet, ComponentLink2URL=https://4donline.ihs.com/images/VipMasterIC/IC/MAXM/MAXMS02453/MAXMS02453-1.pdf?hkey=52A5661711E402568146F3353EA87419, Copyright="Copyright (C) 2018 Accelerated Designs. All rights reserved", Manufacturer_Part_Number=MAX31855KASA+, RefDes=RefDes, Type=DEV, Vendor="Maxim Integrated Products"
U7: "Linear Voltage Regulators 5.0V 1.5A Positive"
U1: ComponentLink1Description="New link", ComponentLink1URL=https://octopart.com/adxl1002bcpz-analog+devices-81920647?r=sp

## Via types
v1: diameter 0.4, hole 0.2, Top Layer to Bottom Layer, 77 vias
v2: diameter 0.8, hole 0.3, Top Layer to Bottom Layer, 2 vias

## Nets (pads, with @x,y where several pads share a name; then routed paths per layer and width w, separated by ;. In a path a pad name is that pad's centre, name@x,y a point inside that pad or via, vN(x,y) a via of type N, cw(c..) or ccw(c..) an arc to the next point about the centre after c; other vN are vias at no path point)
+5V: C2.1 C4.2 C5.2 C6.2 C7.2 C8.1 C9.1 C11.1 C12.1 C13.2 C14.2 C15.1 JLINK1.1 JLINK1.5 L1.1 L1.2 R1.2 R8.1 TK3.1 TK6.1 U1.12 U2.21 U2.52 U2.64 U3.2 U4.3 U7.3 | length 45.7
  Top Layer w0.25: U4.3 21.003,48.4 v1(21.502,48.4) ; U2.52 21,52.043 v1(21.02,52.022) ; v1(24.962,60.985) 24.962,61.026 25,61.063 U2.21 ; v1(31.325,33.785) 31.346,33.807 31.346,34.493 U1.12 ; v1(31.444,48.077) 31.444,48.037 31.767,47.713 31.767,47.103 JLINK1.1
  Top Layer w0.5: v1(45,36.9) 45.54,37.44 U7.3
  Bottom Layer w0.25: C4.2 20.975,51.325 20.975,51.936 21.02,51.982 v1(21.02,52.022) ; C13.2 C14.2 21.25,47.325 21.25,48.108 21.502,48.359 v1(21.502,48.4) ; v1@20.951,52.022 20.992,52.063 20.992,52.091 20.65,52.433 C7.2 20.625,58.025 L1.1 20.675,60 21.66,60.985 v1(24.962,60.985) ; C7.2@21,57.95 C7.2@21,58 ; L1.2 C8.1 C9.1 24.525,57.95 24.1,57.525 24.1,56.2 R1.2 ; C9.1@24.325,57.95 C9.1@24.325,58 ; v1(25.5,49.4) 25.5,48.704 24.57,47.774 24.57,46.986 25.126,46.43 26.22,46.43 v1(26.79,47) ; C2.1 v1(31.325,33.785) ; U3.2 31.6,41.346 31.754,41.5 v1(32.4,41.5) 32.429,41.471 32.754,41.471 33.55,40.675 C12.1
  Bottom Layer w0.3: C11.1 v1(32,50.8)
  Bottom Layer w0.5: C15.1 44.634,36.575 44.959,36.9 v1(45,36.9) 46.75,36.9 R8.1
+24V: 24V.1 C16.1 C17.1 C18.1 U7.1 | length 32
  Top Layer w0.5: U7.1 41,39.31 v2(41,37.8)
  Inner Layer1 w0.5: v2(35.6,36.5) 35.6,34.6 38.104,32.096 38.104,31.096 24V.1@38.2,31
  Bottom Layer w0.5: 24V.1@21.4,31 26.9,36.5 v2(35.6,36.5) 35.638,36.538 36.963,36.538 C16.1 C17.1 C18.1 v2(41,37.8)
ACC_Analog: U1.30 U2.61 | length 25.2
  Top Layer w0.25: U2.61 25.5,52.315 26.394,51.421 29.62,51.421 29.799,51.6 33.3,51.6 35.2,49.7 35.2,43.562 33.82,42.183 30.996,42.183 30.85,42.036 U1.30
CANH: CANH.1 R4.2 U4.7 | length 34.6
  Top Layer w0.25: U4.7 22.235,43.454 22.389,43.3 v1(22.772,43.3)
  Inner Layer1 w0.25: v1(22.772,43.3) 22.2,42.728 22.2,35.812 27,31.012 CANH.1@27,31
  Inner Layer2 w0.25: CANH.1@27,31 28.179,32.179 42.621,32.179 CANH.1@43.8,31
  Bottom Layer w0.25: R4.2 22.6,43.088 22.772,43.259 v1(22.772,43.3)
CANL: CANL.1 R2.1 U4.6 | length 34.5
  Top Layer w0.25: U4.6 20.965,43.454 21.119,43.3 v1(21.5,43.3)
  Inner Layer1 w0.25: v1(21.5,43.3) 21.8,43 21.8,35.5 24.9,32.4 24.9,31.755 24.2,31.055 CANL.1@24.2,31
  Inner Layer2 w0.25: CANL.1@24.2,31 25.379,29.821 39.821,29.821 CANL.1@41,31
  Bottom Layer w0.25: R2.1 20.6,42.775 21.096,43.271 21.471,43.271 v1(21.5,43.3)
CS_TYPK_1: R6.2 TK2.2 U2.14 | length 5.2
  Top Layer w0.25: U2.14 28.663,60.2 28.861,60.002 v1(28.902,60.002)
  Bottom Layer w0.25: v1(28.902,60.002) 28.917,60.002 29.419,59.5 R6.2 30.6,57.7 TK2.2
CS_TYPK_2: R12.2 TK5.2 U2.15 | length 9.2
  Top Layer w0.25: U2.15 v1(29,60.7)
  Bottom Layer w0.25: v1(29,60.7) 29,64 30.125,65.125 30.125,65.175 30.45,65.5 R12.2 30.5,67.4 TK5.2 30.4,67.425 TK5.2@30.075,67.1
Fehler: R7.1 U2.51 | length 20.4
  Top Layer w0.25: v1(19.627,51.465) 19.667,51.465 19.901,51.698 19.922,51.698 20.5,52.276 U2.51
  Inner Layer1 w0.25: v1(19.4,38) 19.116,38.284 19.116,50.916 19.627,51.427 v1(19.627,51.465)
  Bottom Layer w0.25: v1(19.4,38) 20.433,38 21.833,36.6 R7.1
GND: C1.1 C2.2 C3.1 C4.1 C5.1 C6.1 C7.1 C8.2 C9.2 C10.2 C11.2 C12.2 C13.1 C14.1 C15.2 C16.2 C17.2 C18.2 CCTRL1.1 error.1 GND.1 heart.1 JLINK1.3 JLINK1.7 PWR1.1 R2.2 R3.2 R4.1 R5.1 R9.1 R13.1 TK1.1 TK4.1 U1.13 U1.15 U1.16 U1.33 U2.22 U2.53 U2.63 U3.3 U4.2 U5.1 U6.1 U7.4 | length 34.1
  Top Layer w0.25: U2.53 21.5,53.485 22.115,54.1 v1(23.1,54.1) ; U4.2 22.273,48.4 v1(22.772,48.4) ; C3.1 v1(23.8,64) C1.1 ; v1(23.1,59) v1(23.1,58.4) 23.25,58.25 23.25,57.45 23.525,57.725 23.525,60.575 23.883,60.933 24.017,60.933 24.5,61.415 U2.22 ; U2.63@26.5,52.9 26.5,52.315 26.815,52 v1(27.4,52) ; JLINK1.7 JLINK1.3 30.004,47.674 30.004,49.896 v1(30,49.9) ; U1.13 31.854,34.493 31.854,34.03 32.186,33.698 32.613,33.698 v1(32.642,33.67) ; U1.15 32.846,34.493 32.846,33.887 32.7,33.741 32.7,33.7 32.729,33.729 32.906,33.729 33.35,34.173 U1.16 ; U5.1 42.305,57.595 TK1.1 v1(42.4,56.6) ; U6.1 40.628,63.595 41.171,63.051 41.171,62.929 v1(41.2,62.9) ; v1(41.2,62.9) 41.201,62.905 42.075,62.905 TK4.1 ; PWR1.1 v1(48,36.7)
  Bottom Layer w0.25: C13.1 C14.1 22.6,47.325 22.6,48.188 22.772,48.359 v1(22.772,48.4) ; C11.2 29.971,50.729 29.971,49.929 v1(30,49.9) ; v1(32.642,33.67) 32.642,33.033 C2.2
  other v1: 30.263,35.623 32.642,35.6 32.642,37.287 30.263,37.354 32.642,38.006 30.263,38.033 41.785,48.831 43,48.831 44.215,48.831 41.785,49.9 43,49.9 44.215,49.9 41.785,50.969 43,50.969 44.215,50.969 24.949,55.105 23.052,55.49 23.076,56.075 23.1,56.6 25.1,57 23.1,57.2 23.1,57.8 25.148,59.024
Heart: R10.1 U2.50 | length 17.5
  Top Layer w0.25: v1(18.6,51.7) 18.641,51.7 19.016,52.075 19.76,52.075 20,52.315 U2.50
  Inner Layer1 w0.25: v1(18.6,38) v1(18.6,51.7)
  Bottom Layer w0.25: R10.1 18.2,37.587 18.6,37.987 v1(18.6,38)
JTAG_TCK: JLINK1.4 U2.57 | length 10.3
  Top Layer w0.25: U2.57 23.5,52.315 23.783,52.032 24.786,52.032 25.775,51.044 27.609,51.044 29.068,49.585 29.068,48.007 JLINK1.4
JTAG_TDI: JLINK1.8 U2.54 | length 18.1
  Top Layer w0.25: U2.54 22,51.93 v1(22.965,50.965) ; v1(29.3,44.7) 29.315,44.715 29.315,45.715 JLINK1.8
  Bottom Layer w0.25: v1(22.965,50.965) 24.1,49.83 24.1,44.827 26.745,42.183 28.105,42.183 29.3,43.377 v1(29.3,44.7)
JTAG_TDO: JLINK1.6 U2.55 | length 9.6
  Top Layer w0.25: U2.55 22.5,52.249 24.5,50.249 24.5,46.9 25.099,46.3 25.914,46.3 26.381,45.833 26.687,45.833 JLINK1.6
JTAG_TMS: JLINK1.2 U2.56 | length 11.2
  Top Layer w0.25: U2.56 23,52.282 23.627,51.655 24.345,51.655 v1(25,51) ; JLINK1.2 v1(30.6,48.1)
  Bottom Layer w0.25: v1(25,51) 25.597,50.403 26.6,50.403 26.745,50.547 28.153,50.547 v1(30.6,48.1)
MISO_5V: U2.13 U5.7 U6.7 | length 14.2
  Top Layer w0.25: U2.13 28.385,59.7 28.435,59.65 29.22,58.865 U5.7@34.075,58.865 ; U5.7 U5.7@34.075,58.865 ; U6.7 34.075,64.865 33.425,64.215 33.425,59.515 U5.7@34.075,58.865
NetC1_2: C1.2 Q1.2 U2.23 | length 7.1
  Top Layer w0.25: U2.23 24,62.585 24.39,62.975 25.31,62.975 25.95,63.615 25.95,63.625 26.275,63.95 C1.2 26.583,64.308 26.583,66.125 25.708,67 Q1.2
NetC3_2: C3.2 Q1.1 U2.24 | length 6.6
  Top Layer w0.25: Q1.1 21.25,66.65 C3.2 21.575,63.675 21.575,63.615 22.215,62.975 23.11,62.975 23.5,62.585 U2.24
NetC10_1: C10.1 R1.1 U2.62 | length 5.7
  Top Layer w0.25: U2.62 26,53.485 26.487,53.971 26.771,53.971 v1(26.8,54)
  Bottom Layer w0.25: 25.15,54 C10.1 v1(26.8,54) 25.9,54.9 25.9,55.8 R1.1
NetCCTRL1_2: CCTRL1.2 R5.2 U4.8 | length 5.4
  Top Layer w0.25: U4.8 23.505,43.354 23.659,43.2 v1(24.6,43.2)
  Bottom Layer w0.25: v1(24.6,43.2) R5.2 24.6,41.85 24.925,41.525 24.975,41.525 25.23,41.27 CCTRL1.2
NetFehler1_2: error.2 R7.2 | length 1.8
  Top Layer w0.25: error.2 v1(26,36.6)
  Bottom Layer w0.25: R7.2 v1(26,36.6)
NetHeart1_2: heart.2 R10.2 | length 1.8
  Top Layer w0.25: heart.2 v1(20.6,36.6)
  Bottom Layer w0.25: R10.2 v1(20.6,36.6)
NetPWR1_2: PWR1.2 R8.2 | length 2
  Top Layer w0.25: PWR1.2 v1(48,35.1)
  Bottom Layer w0.25: R8.2 47.909,35.15 47.959,35.1 v1(48,35.1)
NetR3_1: R3.1 U4.5 | length 2.6
  Top Layer w0.25: v1(19.696,42.296) U4.5
  Bottom Layer w0.25: R3.1 18.6,41.95 18.925,42.275 19.675,42.275 v1(19.696,42.296)
NetR6_1: R6.1 R9.2 TK2.1 U5.6 | length 6.7
  Top Layer w0.25: v1(34.107,59.651) 34.136,59.68 34.136,59.95 34.321,60.135 U5.6
  Bottom Layer w0.25: TK2.1 31.67,57.875 32.4,58.605 R6.1 ; R9.2 32.4,61.4 R6.1 ; 33.915,59.5 R6.1
NetR12_1: R12.1 R13.2 TK5.1 U6.6 | length 6.7
  Top Layer w0.25: v1(33.979,65.638) 34.008,65.667 34.008,65.95 34.192,66.135 U6.6
  Bottom Layer w0.25: TK5.1 31.67,67.125 32.3,66.495 R12.1 ; R13.2 R12.1 ; 33.8,65.5 R12.1
NetTK3_2: TK3.2 U5.4 | length 2.3
  Top Layer w0.25: U5.4 41.66,61.405 42.025,61.77 TK3.2
NetTK6_2: TK6.2 U6.4 | length 2.3
  Top Layer w0.25: U6.4 41.66,67.405 42.025,67.77 TK6.2
Reset: JLINK1.10 U2.20 U3.1 | length 33.8
  Top Layer w0.25: U2.20 25.5,61.216 25.7,61.016 v1(25.7,61) ; v1(29.7,42.2) 29.7,42.828 31.834,44.962 31.834,45.694 JLINK1.10
  Inner Layer2 w0.25: v1(25.7,61) 28.421,58.279 28.421,55.947 34.783,49.585 34.783,43.145 33.82,42.183 29.717,42.183 v1(29.7,42.2)
  Bottom Layer w0.25: v1(29.7,42.2) 29.71,42.19 29.71,41.01 U3.1
RX_CAN: U2.31 U4.4 | length 15.4
  Top Layer w0.25: U4.4 19.697,48.365 19.697,49.597 v1(19.7,49.6) ; v1(19.9,61) 19.9,61.041 20,61.141 U2.31
  Inner Layer1 w0.25: v1(19.7,49.6) 19.707,49.607 20.107,49.607 21.599,51.099 21.599,58.767 19.929,60.438 19.929,60.971 v1(19.9,61)
SCK_SPI_5V: U2.11 U5.5 U6.5 | length 16.4
  Top Layer w0.25: U2.11 28.581,58.7 28.981,58.3 v1(29,58.3) ; v1(33.4,67.3) 33.429,67.329 34.499,67.329 U6.5 ; v1(34.004,62) 34.033,61.971 34.033,61.59 34.217,61.405 U5.5
  Inner Layer1 w0.25: v1(29,58.3) 31.47,58.3 34.004,60.834 v1(34.004,62) ; v1(33.4,67.3) 33.4,62.58 33.98,62 v1@34,62
T+1: T+1.1 U5.3 | length 36.9
  Top Layer w0.25: U5.3 40.725,60.135 41.26,59.6 v1(43.7,59.6)
  Inner Layer1 w0.25: T+1.1 34.821,33.221 34.821,42.569 38.265,46.013 38.265,54.165 v1(43.7,59.6)
T+2: T+2.1 U6.3 | length 40.7
  Top Layer w0.25: U6.3 40.725,66.135 41.46,65.4 v1(43.7,65.4)
  Inner Layer1 w0.25: v1(43.7,65.4) 46.421,62.679 46.421,33.774 49.195,31 T+2.1
T-1: T-1.1 TK1.2 U5.2 | length 34.8
  Top Layer w0.25: U5.2 40.73,58.865 41.195,58.4 41.25,58.4 41.295,58.445 42.075,58.445 TK1.2
  Inner Layer1 w0.25: T-1.1 30.069,31 32.063,32.994 32.063,40.344 34.783,43.064 34.783,51.983 v1(41.2,58.4)
T-2: T-2.1 TK4.2 U6.2 | length 38.3
  Top Layer w0.25: U6.2 40.833,64.865 41.198,64.5 TK4.2 42.409,64.491 v1(43.691,64.491)
  Inner Layer1 w0.25: v1(43.691,64.491) 45.7,62.481 45.7,31.9 T-2.1
TX_CAN: U2.30 U4.1 | length 15.4
  Top Layer w0.25: U2.30 20.5,61.141 20.6,61.041 v1(20.6,61) ; v1(23.5,49.6) 23.503,49.598 23.503,48.365 U4.1
  Inner Layer1 w0.25: v1(20.6,61) 20.6,60.3 21.976,58.924 21.976,50.224 22.6,49.6 v1(23.5,49.6)
pads on no net: JLINK1. JLINK1.9 U1.1 U1.2 U1.3 U1.4 U1.5 U1.6 U1.7 U1.8 U1.9 U1.10 U1.11 U1.14 U1.17 U1.18 U1.19 U1.20 U1.21 U1.22 U1.23 U1.24 U1.25 U1.26 U1.27 U1.28 U1.29 U1.31 U1.32 U2.1 U2.2 U2.3 U2.4 U2.5 U2.6 U2.7 U2.8 U2.9 U2.10 U2.12 U2.16 U2.17 U2.18 U2.19 U2.25 U2.26 U2.27 U2.28 U2.29 U2.32 U2.33 U2.34 U2.35 U2.36 U2.37 U2.38 U2.39 U2.40 U2.41 U2.42 U2.43 U2.44 U2.45 U2.46 U2.47 U2.48 U2.49 U2.58 U2.59 U2.60 U5.8 U6.8

## Polygon pours and split planes (outlines as drawn)
GND on Bottom Layer "GND_L04_P000" (solid, remove dead copper, pour order 0): 17.225,68.7 50.6,68.7 50.6,28.6 17.225,28.6
+5V on Top Layer "+5V_L01_P003" (solid, remove dead copper, pour order 3): 17.3,69.1 50.8,69.1 50.8,28.6 17.3,28.6
GND on Inner Layer1 "GND_L02_P004" (solid, remove dead copper, pour order 4): 17.2,69 50.6,69 50.6,28.8 17.2,28.8
GND on Inner Layer2 "GND_L03_P005" (solid, remove dead copper, pour order 5): 17.2,69.1 50.6,69.1 50.6,28.7 17.2,28.7

## Silkscreen, mask and mechanical layers (free items; w line width, h text height)
Top Overlay:
  circle w0.25: c38,43.9 r0.125
Boardoutline:
  lines w0.254: 17.1,28.6 17.1,69.1 50.8,69.1 50.8,28.6 17.1,28.6